# Altium PCB Level_Detector.PcbDoc
Units mm, origin at the board's own origin, x right, y up, seen from the top; angles counter-clockwise.
Board outline 125 x 80.64 mm, 2 copper layers (Top Layer, Bottom Layer); 35 components, 37 nets, 113 pads, 5 vias.
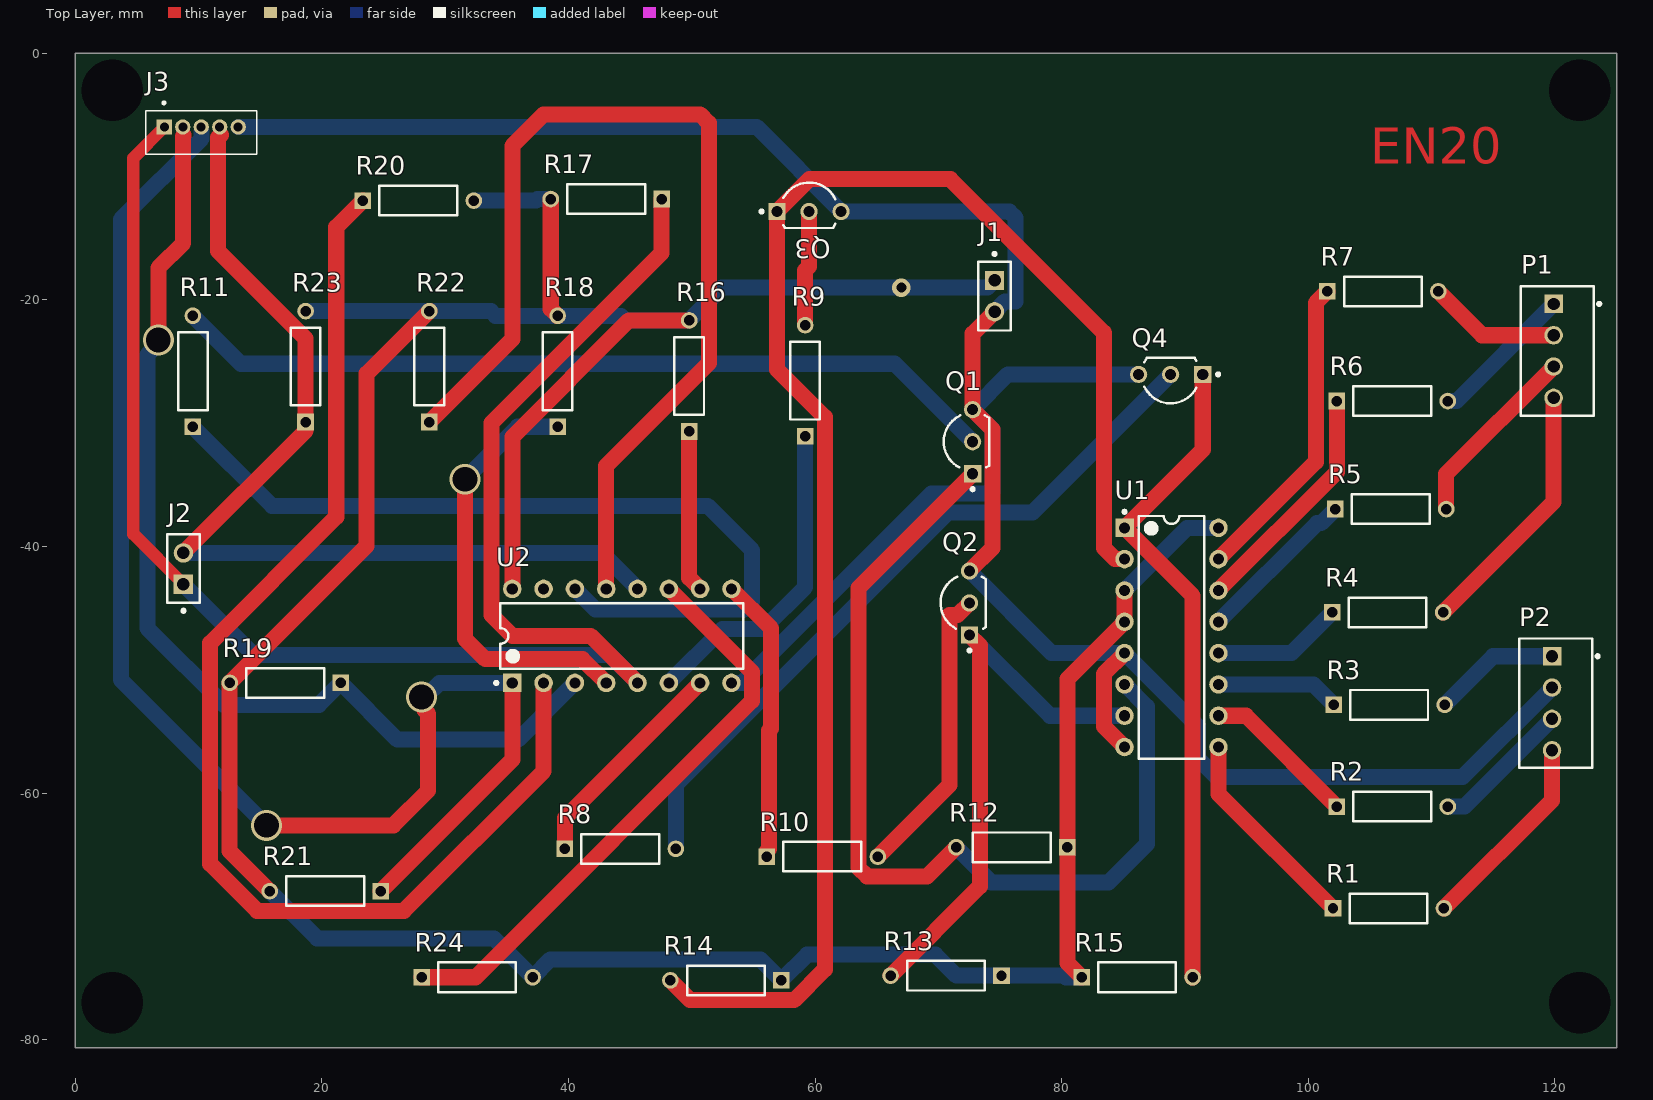
[diagram p0: Top Layer view]
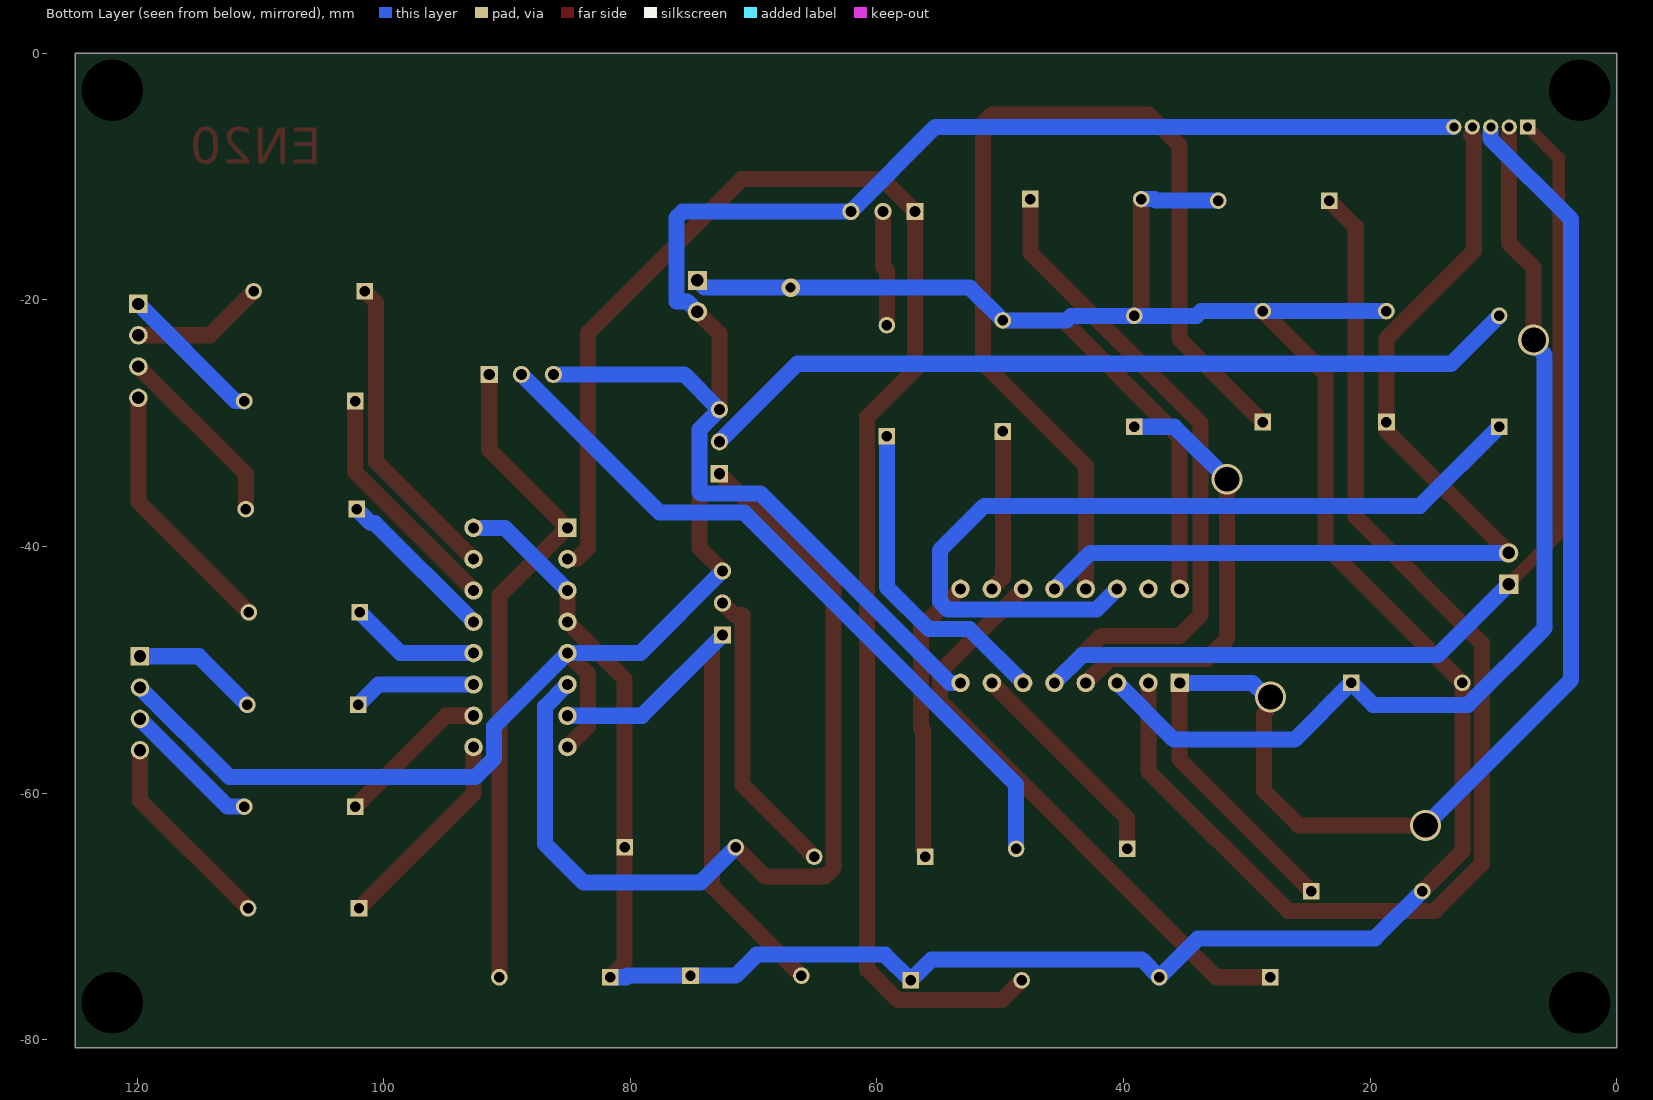
[diagram p1: Bottom Layer view, seen from below]

## Layer stack, top to bottom
Top Solder: solder mask 0.0102, Solder Resist, Dk 3.5
Top Layer: signal copper 0.0356
Dielectric 1: dielectric 0.32, FR-4, Dk 4.8
Bottom Layer: signal copper 0.0356
Bottom Solder: solder mask 0.0102, Solder Resist, Dk 3.5

## Board outline
0,-80.645 125,-80.645 125,0 0,0

## Design rules (kind name [scope] priority, off if disabled: settings)
Clearance [All] p1: gap=0.254 ignorepadtopadclearanceinfootprint=FALSE except(0: Arc-Hole Track-Hole SMDPad-Hole THPad-Hole Via-Hole Fill-Hole Poly-Hole Region-Hole Text-Hole)
PolygonConnect [All] p1: connectstyle=Relief reliefconductorwidth=0.254 reliefentries=4 polygonreliefangle="90 Angle" airgapwidth=0.254
RoutingVias [All] p1: holewidth=2 width=2.5 viastyle="Through Hole" minholewidth=2 minwidth=2.5 maxholewidth=2 maxwidth=2.5
SolderMaskExpansion [All] p1: expansion=0.102 istentingtop=FALSE
Width [All] p1: maxlimit=2 minlimit=1 preferedwidth=1.3 minimp=50.000000 maximp=50.000000 favimp=50.000000
30 further rules are at their usual default settings.

## Components (designator, comment, footprint, x,y, rotation, side; value= is the part's Value field where it differs from the comment)
J1 "M20-9990246" FP-M20-9990246-MFG 74.549,-19.685 r270 top
J2 "M20-9990246" FP-M20-9990246-MFG 8.763,-41.783 r90 top
J3 "B5B-ZR(LF)(SN)" JST_B5B-ZR(LF)(SN) 7.208,-5.969 r180 top
P1 "7segmentUP" 61900411121 120.188,-24.13 r90 top
P2 "7segmentDOWN" 61900411121 120.061,-52.705 r90 top
Q1 "BC547" ONSC-TO-92-3-29-11_AM_BL 72.771,-31.496 r90 top
Q2 "BC547" ONSC-TO-92-3-29-11_AM_BL 72.517,-44.577 r90 top
Q3 "BC547" ONSC-TO-92-3-29-11_AM_BL 59.503,-12.827 r0 top
Q4 "BC547" ONSC-TO-92-3-29-11_AM_BL 88.833,-26.035 r180 top
R1 "MFR-25FBF52-1K" RESA60-630X240 106.498,-69.342 r0 top
R2 "MFR-25FBF52-1K" RESA60-630X240 106.807,-61.087 r0 top
R3 "MFR-25FBF52-1K" RESA60-630X240 106.553,-52.832 r0 top
R4 "MFR-25FBF52-1K" RESA60-630X240 106.426,-45.339 r0 top
R5 "MFR-25FBF52-1K" RESA60-630X240 106.68,-36.957 r0 top
R6 "MFR-25FBF52-1K" RESA60-630X240 106.807,-28.194 r0 top
R7 "MFR-25FBF52-1K" RESA60-630X240 106.045,-19.304 r0 top
R8 "MFR-25FBF52-1K" RESA60-630X240 44.196,-64.516 r0 top
R9 "MFR-25FBF52-1K" RESA60-630X240 59.182,-26.543 r90 top
R10 "MFR-25FBF52-1K" RESA60-630X240 60.579,-65.151 r0 top
R11 "MFR-25FBF52-1K" RESA60-630X240 9.525,-25.781 r90 top
R12 "MFR-25FBF52-1K" RESA60-630X240 75.946,-64.389 r180 top
R13 "MFR-25FBF52-1K" RESA60-630X240 70.612,-74.803 r180 top
R14 "MFR-25FBF52-1K" RESA60-630X240 52.76,-75.184 r180 top
R15 "MFR-25FBF52-1K" RESA60-630X240 86.106,-74.93 r0 top
R16 "MFR-25FBF52-1K" RESA60-630X240 49.784,-26.162 r90 top
R17 "MFR-25FBF52-1K" RESA60-630X240 43.053,-11.811 r180 top
R18 "MFR-25FBF52-1K" RESA60-630X240 39.116,-25.781 r90 top
R19 "MFR-25FBF52-1K" RESA60-630X240 17.018,-51.054 r180 top
R20 "MFR-25FBF52-1K" RESA60-630X240 27.813,-11.938 r0 top
R21 "MFR-25FBF52-1K" RESA60-630X240 20.265,-67.945 r180 top
R22 "MFR-25FBF52-1K" RESA60-630X240 28.702,-25.4 r90 top
R23 "MFR-25FBF52-1K" RESA60-630X240 18.669,-25.4 r90 top
R24 "MFR-25FBF52-1K" RESA60-630X240 32.584,-74.93 r0 top
U1 "CD4511BE" N0016A 88.9,-47.371 r0 top
U2 "CD74HC147E" N0016A 44.323,-47.244 r90 top

## Footprints (in the part's own frame and the unit in brackets; to place one, negate y for a bottom-side part, rotate by r counter-clockwise, add the part's x,y. Pads: shape width x height; smd on the part's side, far side on the other; paste and mask are expansions set on the pad)
61900411121 [mm] "2.54mm Male Locking Header, 4p"
  rect 1.5x1.5 hole 1: 1(3.81,0.3)
  round 1.5 hole 1: 2(1.27,0.3) 3(-1.27,0.3) 4(-3.81,0.3)
  silkscreen extent -5.25,-3.52 5.25,2.97, body extent -5.08,-2.9 5.08,2.9, height 11.53
FP-M20-9990246-MFG [mm]
  rect 1.57x1.57 hole 1.02 paste-1000 mask+0: 1(-1.27,0)
  round 1.57 hole 1.02 paste-1000 mask+0: 2(1.27,0)
  silkscreen extent -3.55,-1.32 2.79,1.32, body extent -2.89,-1.42 2.89,1.42, height 0.25
JST_B5B-ZR(LF)(SN) [mm]
  rect 1.238x1.238 hole 0.73: 1(0,0)
  round 1.238 hole 0.73: 2(-1.5,0) 3(-3,0) 4(-4.5,0) 5(-6,0)
  silkscreen extent -7.5,-2.06 1.5,2.2
N0016A [mm] "DIP, 16-Leads, Body 19.7x6.6mm, Pitch 2.54mm"
  rect 1.5x1.5 hole 0.9: 1(-3.81,8.89)
  round 1.5 hole 0.9: 2(-3.81,6.35) 3(-3.81,3.81) 4(-3.81,1.27) 5(-3.81,-1.27) 6(-3.81,-3.81) 7(-3.81,-6.35) 8(-3.81,-8.89) 9(3.81,-8.89) 10(3.81,-6.35) 11(3.81,-3.81) 12(3.81,-1.27) 13(3.81,1.27) 14(3.81,3.81) 15(3.81,6.35) 16(3.81,8.89)
  silkscreen extent -3.93,-9.85 2.65,10.31, body extent -3.95,-9.85 3.95,9.85, height 5.08
ONSC-TO-92-3-29-11_AM_BL [mm] "TO, 3-Leads, Body Dia 4.7mm, Pitch 2.6mm"
  rect 1.4x1.4 hole 0.9: 1(-2.6,0)
  round 1.4 hole 0.9: 2(0,0) 3(2.6,0)
  silkscreen extent -3.97,-1.34 2.13,2.35, body extent -2.84,-1.34 2.84,2.35, height 5.33
RESA60-630X240 [mm] "Axial Resistor, 2-Leads, Dia 2.4mm, Body Length 6.3mm"
  rect 1.35x1.35 hole 0.85: 1(-4.5,0)
  round 1.35 hole 0.85: 2(4.5,0)
  silkscreen extent -3.15,-1.2 3.15,1.2, body extent -3.15,-1.2 3.15,1.2, height 2.4

## Part data
J1 J2: library part CMP-15831-000009-1, "CONN HEADER VERT 2POS 2.54MM", Current Rating=3A, Manufacturer=Harwin, Temperature="-40°C to +105°C", Temperature Range High=+105°C, Temperature Range Low=-40°C, Automotive=No, Category=Conn, ComponentLink2Description=Datasheet, ComponentLink2URL=https://cdn.harwin.com/pdfs/M20-999.pdf, Conn Gender=Male, Conn Orientation=Vertical, Contact Material=Tin,Nickel, Device Class L1=Connectors, Device Class L2="Headers and Wire Housings", Device Class L3=unset, Digikey Description="CONN HEADER VERT 2POS 2.54MM", Height=8.99mm, Lead Free=Yes, Manufacturer Part Number=M20-9990246, Mouser Description="2.54mm (0.1\") Pitch SIL Vertical PC Tail Pin Header, 6.1mm mating pin height, tin, 2 contacts", Number Of Contacts=2, Number Of Rows=1, Octopart=https://octopart.com/m20-9990246-harwin-2590635, Package=M20-9990246, Pitch=2.54mm, RoHS=TRUE
J3: "Connector Header Through Hole 5 position 0.059 (1.50mm)", Package=None, Availability=Warning, Check_prices=https://www.snapeda.com/parts/B5B-ZR(LF)(SN)/JST%20Sales%20America%20Inc./view-part/214617/?ref=eda, MF="JST Sales", MP=B5B-ZR(LF)(SN), Price=None, Purchase-URL=https://pricing.snapeda.com/search/part/B5B-ZR(LF)(SN)/?ref=eda, SnapEDA_Link=https://www.snapeda.com/parts/B5B-ZR(LF)(SN)/JST%20Sales%20America%20Inc./view-part/214617/?ref=snap
P1 P2: library part CMP-1502-00586-1, "Male Locking Header WR-WTB, THT, Vertical, pitch 2.54 mm, 1 x 4 position", Contact Resistance=20mOhm, Manufacturer="Wurth Elektronik", Operating Temperature=-40to105degC, Package Reference=61900411121, Working Voltage=250VAC, Datasheet URL=https://katalog.we-online.de/em/datasheet/6190xx11121.pdf, Gender=Male, Manufacturer URL=http://www.we-online.de, Mounting Technology=THT, Orientation=Vertical, Packaging=Bag, Part Number=61900411121, Pitch=2.54mm, Position=1x4, Publisher=WurthElektronik
Q1 Q2 Q3 Q4: library part CMP-1048-01605-1, "Amplifier Transistor, NPN Silicon, 3-Pin TO-92, Pb-Free, Tape and Reel", Manufacturer="On Semiconductor", PartNumber=BC547BRL1G, ComponentLink1Description="Manufacturer URL", ComponentLink1URL=http://www.onsemi.com/, ComponentLink2Description=Datasheet, ComponentLink2URL=http://www.onsemi.com/pub_link/Collateral/BC546-D.PDF, ComponentLink3Description="Package Specification", ComponentLink3URL=http://www.onsemi.com/pub_link/Collateral/MAC97-D.PDF, DatasheetVersion="Rev. 7", fT Min (MHz)=150, IC Continuous (A)=0.1, Mounting Technology="Through Hole", PackageDescription="3-Pin Transistor Outline, Body 4.825 x 3.685 mm, Pitch 1.27 mm", PackageReference=TO-92-3-29-11_AM_BL, PackageVersion="Rev. AM", Packing="Tape and Reel", Polarity=NPN, RoHS=TRUE
R1 R2 R3 R4 R5 R6 R7: library part CMP-1659-00075-1, "Axial Resistor, 1 KOhm, +/- 1%, 250 mW, -55 to 155 degC, 2-Pin THD, RoHS, Bulk", Case\Package=Axial, Max Operating Temperature="155 degC", Min Operating Temperature="-55 degC", Package Quantity=200, Power Rating="250 mW", Resistance="470 ohm", Tolerance=1%, Voltage Rating="250 V", ComponentLink1Description="Manufacturer URL", ComponentLink1URL=http://www.yageo.com/, ComponentLink2Description=Datasheet, ComponentLink2URL=http://www.yageo.com/documents/recent/Yageo%20LR_MFR_2013.pdf, DatasheetVersion=Apr-13, Length="0.248 inch", PackageDescription="2-Pin Axial Lead, Dia 2.4 mm, Body Length 6.3 mm", PackageReference=MFR-25, Packaging=Bulk, RoHSCompliant=true
R8 R9 R10 R11: library part CMP-1659-00075-1, "Axial Resistor, 1 KOhm, +/- 1%, 250 mW, -55 to 155 degC, 2-Pin THD, RoHS, Bulk", Case\Package=Axial, Max Operating Temperature="155 degC", Min Operating Temperature="-55 degC", Package Quantity=200, Power Rating="250 mW", Resistance="10 kohm", Tolerance=1%, Voltage Rating="250 V", ComponentLink1Description="Manufacturer URL", ComponentLink1URL=http://www.yageo.com/, ComponentLink2Description=Datasheet, ComponentLink2URL=http://www.yageo.com/documents/recent/Yageo%20LR_MFR_2013.pdf, DatasheetVersion=Apr-13, Length="0.248 inch", PackageDescription="2-Pin Axial Lead, Dia 2.4 mm, Body Length 6.3 mm", PackageReference=MFR-25, Packaging=Bulk, RoHSCompliant=true
R12 R13 R14 R15: library part CMP-1659-00075-1, "Axial Resistor, 1 KOhm, +/- 1%, 250 mW, -55 to 155 degC, 2-Pin THD, RoHS, Bulk", Case\Package=Axial, Max Operating Temperature="155 degC", Min Operating Temperature="-55 degC", Package Quantity=200, Power Rating="250 mW", Resistance="33 kohm", Tolerance=1%, Voltage Rating="250 V", ComponentLink1Description="Manufacturer URL", ComponentLink1URL=http://www.yageo.com/, ComponentLink2Description=Datasheet, ComponentLink2URL=http://www.yageo.com/documents/recent/Yageo%20LR_MFR_2013.pdf, DatasheetVersion=Apr-13, Length="0.248 inch", PackageDescription="2-Pin Axial Lead, Dia 2.4 mm, Body Length 6.3 mm", PackageReference=MFR-25, Packaging=Bulk, RoHSCompliant=true
R16 R17 R18 R19 R20 R21 R22 R23 R24: library part CMP-1659-00075-1, "Axial Resistor, 1 KOhm, +/- 1%, 250 mW, -55 to 155 degC, 2-Pin THD, RoHS, Bulk", Case\Package=Axial, Max Operating Temperature="155 degC", Min Operating Temperature="-55 degC", Package Quantity=200, Power Rating="250 mW", Resistance="560 kohm", Tolerance=1%, Voltage Rating="250 V", ComponentLink1Description="Manufacturer URL", ComponentLink1URL=http://www.yageo.com/, ComponentLink2Description=Datasheet, ComponentLink2URL=http://www.yageo.com/documents/recent/Yageo%20LR_MFR_2013.pdf, DatasheetVersion=Apr-13, Length="0.248 inch", PackageDescription="2-Pin Axial Lead, Dia 2.4 mm, Body Length 6.3 mm", PackageReference=MFR-25, Packaging=Bulk, RoHSCompliant=true
U1: library part CMP-0388-00316-2, "CMOS BCD-to-7-Segment LED Latch / Decoder / Driver, 3 to 18 V, -55 to 125 degC, 16-pin DIP (N16), Pb-Free (RoHS)", Manufacturer="Texas Instruments", Rating=Military, Code_JEDEC=MS-001, ComponentLink1Description="Manufacturer URL", ComponentLink1URL=http://www.ti.com/, ComponentLink2Description=Datasheet, ComponentLink2URL=http://www.ti.com/general/docs/lit/getliterature.tsp?genericPartNumber=CD4511B&fileType=pdf, ComponentLink3Description="Package Specification", ComponentLink3URL=http://www.ti.com/litv/pdf/mpdi002c, DatasheetVersion=SCHS072B, Eco-Plan="Pb-Free (RoHS)", Mounting Technology="Through Hole", PackageDescription="16-Pin Plastic In-Line, Body 19.305 x 6.35 mm, Pitch 2.54 mm", PackageReference=N0016A, PackageVersion=4040049/E, PartNumber=CD4511BE, SubFamily="Discrete Segment LED Driver", Vin(Max)(V)=18, Vin(Min)(V)=3
U2: library part CMP-1633-00707-2, "High Speed CMOS Logic 10-to-4 Line Priority Encoder, N0016A, TUBE", F @ Nom Voltage(Max)(Mhz)=28, Generic Part Number=CD74HC147, ICC @ Nom Voltage(Max)(mA)=0.08, Manufacturer="Texas Instruments", Operating Temperature Range(C)="-55 to 125", Rating=Catalog, tpd @ Nom Voltage(Max)(ns)=32, Voltage(Nom)(V)=3.3,5, Bits(#)=10, Channels(#)=1, Code_JEDEC=MS-001, Configuration=10：4, DatasheetVersion=SCHS149F, Function=Encoder/Multiplexer, Input Type=LVTTL/CMOS, Output Drive (IOL/IOH)(Max)(mA)=5.2/-5.2, Output Type=CMOS, PackageReference=N0016A, Schmitt Trigger=No, Technology Family=HC, Type=Standard, VCC(Max)(V)=6, VCC(Min)(V)=2

## Free pads (board coordinates)
  round 1.524 hole 5: 4(3,-77) 4(3,-3) 4(122,-77) 4(122,-3)

## Via types
v1: diameter 2.5, hole 2, Top Layer to Bottom Layer, 4 vias
v2: diameter 1.5, hole 0.8, Top Layer to Bottom Layer, 1 vias

## Nets (pads, with @x,y where several pads share a name; then routed paths per layer and width w, separated by ;. In a path a pad name is that pad's centre, name@x,y a point inside that pad or via, vN(x,y) a via of type N, cw(c..) or ccw(c..) an arc to the next point about the centre after c; other vN are vias at no path point)
GND: J1.2 J3.5 P2.2 Q1.3 Q2.3 Q3.3 Q4.3 U1.5 U1.8 U2.8 | length 215.4
  Top Layer w1.3: Q2.3 74.397,-40.097 74.397,-30.522 Q1.3 72.771,-22.733 J1.2 ; U1.8 83.414,-54.585 83.414,-50.317 U1.5
  Bottom Layer w1.3: J3.5@13.231,-5.969 55.245,-5.969 Q3.3 75.743,-12.827 76.251,-13.335 76.251,-20.117 75.387,-20.117 J1.2 ; U2.8 54.068,-51.054 69.422,-35.7 74.282,-35.7 74.397,-35.585 74.397,-30.522 Q1.3 75.632,-26.035 Q4.3 ; Q2.3 79.181,-48.641 U1.5 91.034,-54.585 91.034,-57.15 92.583,-58.699 112.497,-58.699 P2.2
NetJ1_1: J1.1 R12.1 R13.1 R14.1 R15.1 R16.2 R17.2 R18.2 R19.2 R20.2 R21.2 R22.2 R23.2 R24.2 U1.3 U1.4 U1.16 U2.16 | length 274.4
  Top Layer w1.3: R21.2 12.518,-64.698 R19.2 23.622,-39.95 23.622,-25.98 R22.2 ; U2.16 35.433,-31.115 44.886,-21.662 R16.2 ; R17.2 38.553,-20.718 R18.2 ; R15.1 80.446,-73.77 R12.1 80.446,-50.745 U1.4 U1.3
  Bottom Layer w1.3: R21.2 19.6,-71.78 33.934,-71.78 R24.2 38.532,-73.482 55.558,-73.482 R14.1 59.343,-73.101 69.748,-73.101 71.45,-74.803 R13.1 80.213,-74.803 80.34,-74.93 R15.1 ; R23.2 R22.2 33.706,-20.9 34.087,-21.281 R18.2 44.247,-21.281 44.628,-21.662 R16.2 52.446,-19 v2(67,-19) 73.964,-19 J1.1 ; R20.2 37.363,-11.938 37.49,-11.811 R17.2 ; U1.3 90.17,-38.481 U1.16
NetJ2_1: J2.1 J3.1 R17.1 U2.5 | length 133.5
  Top Layer w1: J3.1 4.699,-8.478 4.699,-38.989 J2.1
  Top Layer w1.3: U2.5 41.783,-47.244 35.433,-47.244 33.757,-45.568 33.757,-29.972 47.553,-16.176 R17.1
  Bottom Layer w1.3: J2.1 14.507,-48.797 43.336,-48.797 U2.5
NetJ2_2: J2.2 J3.4 R23.1 U2.12 | length 79.1
  Top Layer w1.3: J2.2 18.669,-30.607 R23.1 18.669,-23.133 11.578,-16.042 11.578,-6.837 11.811,-6.604
  Bottom Layer w1.3: J2.2 42.672,-40.513 U2.12
NetJ3_2: J3.2 R19.1 U2.3 | length 83
  Top Layer w1.3: v1(6.731,-23.241) 6.731,-17.399 8.731,-15.399 8.731,-6.731 8.763,-6.699 8.763,-6.604
  Bottom Layer w1.3: v1(6.731,-23.241) 6.731,-23.566 5.842,-24.455 5.842,-46.611 12.063,-52.832 19.74,-52.832 R19.1 26.115,-55.651 35.916,-55.651 U2.3
NetJ3_3: J3.3 R21.1 U2.1 | length 115.1
  Top Layer w1.3: v1(15.494,-62.611) 25.781,-62.611 28.609,-59.783 28.609,-53.559 28.297,-53.246 28.297,-52.427 v1(28.067,-52.197) ; R21.1 35.433,-57.277 U2.1
  Bottom Layer w1.3: J3.3@10.231,-6.35 10.231,-6.914 3.683,-13.462 3.683,-50.8 v1(15.494,-62.611) ; v1(28.067,-52.197) 28.392,-52.197 29.535,-51.054 U2.1
NetP1_1: P1.1 R6.2 | length 11.8
  Bottom Layer w1.3: R6.2 112.014,-28.194 P1.1
NetP1_2: P1.2 R7.2 | length 10.8
  Top Layer w1.3: R7.2 114.101,-22.86 P1.2
NetP1_3: P1.3 R5.2 | length 15.2
  Top Layer w1.3: R5.2 111.18,-34.108 P1.3
NetP1_4: P1.4 R4.2 | length 21.1
  Top Layer w1.3: R4.2 119.888,-36.377 P1.4
NetP2_1: P2.1 R3.2 | length 10.3
  Bottom Layer w1.3: R3.2 114.99,-48.895 P2.1
NetP2_3: P2.3 R2.2 | length 11.4
  Bottom Layer w1.3: R2.2 112.649,-61.087 P2.3
NetP2_4: P2.4 R1.2 | length 16.5
  Top Layer w1.3: R1.2 119.761,-60.579 P2.4
NetQ1_1: Q1.1 R12.2 U1.6 | length 76.6
  Top Layer w1.3: R12.2 69.084,-66.751 64.211,-66.751 63.5,-66.04 63.5,-43.367 Q1.1
  Bottom Layer w1.3: R12.2 74.291,-67.234 83.795,-67.234 86.893,-64.135 86.893,-52.984 U1.6
NetQ1_2: Q1.2 R11.2 | length 67.5
  Bottom Layer w1.3: R11.2 13.415,-25.171 66.446,-25.171 Q1.2
NetQ2_1: Q2.1 R13.2 U1.7 | length 46.3
  Top Layer w1.3: R13.2 73.355,-67.56 73.355,-48.015 Q2.1
  Bottom Layer w1.3: Q2.1 79.061,-53.721 U1.7
NetQ2_2: Q2.2 R10.2 | length 24
  Top Layer w1.3: R10.2 70.891,-59.339 70.891,-45.542 71.552,-45.542 Q2.2
NetQ3_1: Q3.1 R14.2 U1.2 | length 129.6
  Top Layer w1.3: R14.2 49.86,-76.784 58.293,-76.784 60.782,-74.295 60.782,-29.508 56.903,-25.629 Q3.1 59.526,-10.204 70.961,-10.204 83.414,-22.657 83.414,-40.107 84.328,-41.021 U1.2
NetQ3_2: Q3.2 R9.2 | length 9.3
  Top Layer w1.3: R9.2 59.182,-17.602 59.503,-17.281 Q3.2
NetQ4_1: Q4.1 R15.2 U1.1 | length 53.8
  Top Layer w1.3: R15.2 90.606,-43.997 U1.1 91.433,-32.138 Q4.1
NetQ4_2: Q4.2 R8.2 | length 59.1
  Bottom Layer w1.3: R8.2 48.696,-59.305 70.747,-37.254 77.614,-37.254 Q4.2
NetR1_1: R1.1 U1.9 | length 16.9
  Top Layer w1.3: U1.9 92.71,-60.054 R1.1
NetR2_1: R2.1 U1.10 | length 12.6
  Top Layer w1.3: U1.10 94.941,-53.721 R2.1
NetR3_1: R3.1 U1.11 | length 10
  Bottom Layer w1.3: U1.11 100.402,-51.181 R3.1
NetR4_1: R4.1 U1.12 | length 10.6
  Bottom Layer w1.3: U1.12 98.624,-48.641 R4.1
NetR5_1: R5.1 U1.13 | length 13.3
  Bottom Layer w1.3: U1.13 100.715,-38.096 101.041,-38.096 R5.1
NetR6_1: R6.1 U1.14 | length 19.3
  Top Layer w1.3: U1.14 102.307,-33.964 R6.1
NetR7_1: R7.1 U1.15 | length 25.4
  Top Layer w1.3: U1.15 100.605,-33.126 100.605,-20.244 R7.1
NetR8_1: R8.1 U2.7 | length 18
  Top Layer w1.3: R8.1 39.696,-62.031 U2.7
NetR9_1: R9.1 U2.6 | length 26.5
  Bottom Layer w1.3: U2.6 52.502,-46.685 55.778,-46.685 59.182,-43.282 R9.1
NetR10_1: R10.1 U2.9 | length 23.2
  Top Layer w1.3: U2.9 56.421,-46.642 56.421,-54.751 56.261,-54.911 56.261,-64.538 56.104,-64.695 56.104,-65.126 R10.1
NetR11_1: R11.1 U2.14 | length 69
  Bottom Layer w1.3: R11.1 15.947,-36.703 51.282,-36.703 54.889,-40.31 54.889,-44.45 54.229,-45.11 42.189,-45.11 U2.14
NetR16_1: R16.1 U2.10 | length 13.1
  Top Layer w1.3: R16.1 49.784,-42.545 U2.10
NetR18_1: R18.1 U2.4 | length 35.2
  Top Layer w1.3: v1(31.598,-34.544) 31.598,-47.473 33.249,-49.124 41.123,-49.124 U2.4
  Bottom Layer w1.3: v1(31.598,-34.544) 35.861,-30.281 R18.1
NetR20_1: R20.1 U2.2 | length 99.4
  Top Layer w1.3: R20.1 21.158,-14.093 21.158,-37.592 10.922,-47.828 10.922,-65.735 14.732,-69.545 26.645,-69.545 37.973,-58.217 U2.2
NetR22_1: R22.1 U2.13 | length 83.7
  Top Layer w1.3: R22.1 35.433,-23.169 35.433,-7.493 37.973,-4.953 50.673,-4.953 51.384,-5.664 51.384,-25.121 43.053,-33.452 U2.13
NetR24_1: R24.1 U2.11 | length 47.9
  Top Layer w1.3: R24.1 32.461,-74.93 54.867,-52.524 54.867,-50.168 U2.11
pads on no net: U2.15

## Other copper
Top Layer:
  text "EN20" at 105,-9.944 h5